# Altium PCB ZYNQ-HS-DEV-PCB.PcbDoc (part 6 of 13)
Units mm, origin at the board's own origin, x right, y up, seen from the top; angles counter-clockwise.
Board outline 125.73 x 111.93 mm, 10 copper layers (S1 (SIG), S2 (GND), S3 (SIG), S4 (GND), S5 (PWR), S6 (SIG), S7 (GND), S8 (SIG), S9 (GND), S10 (SIG)), stack 1.597 mm thick; 545 components, 400 nets, 2449 pads, 1577 vias.
Unrouted connection lines stored in the file: 309.
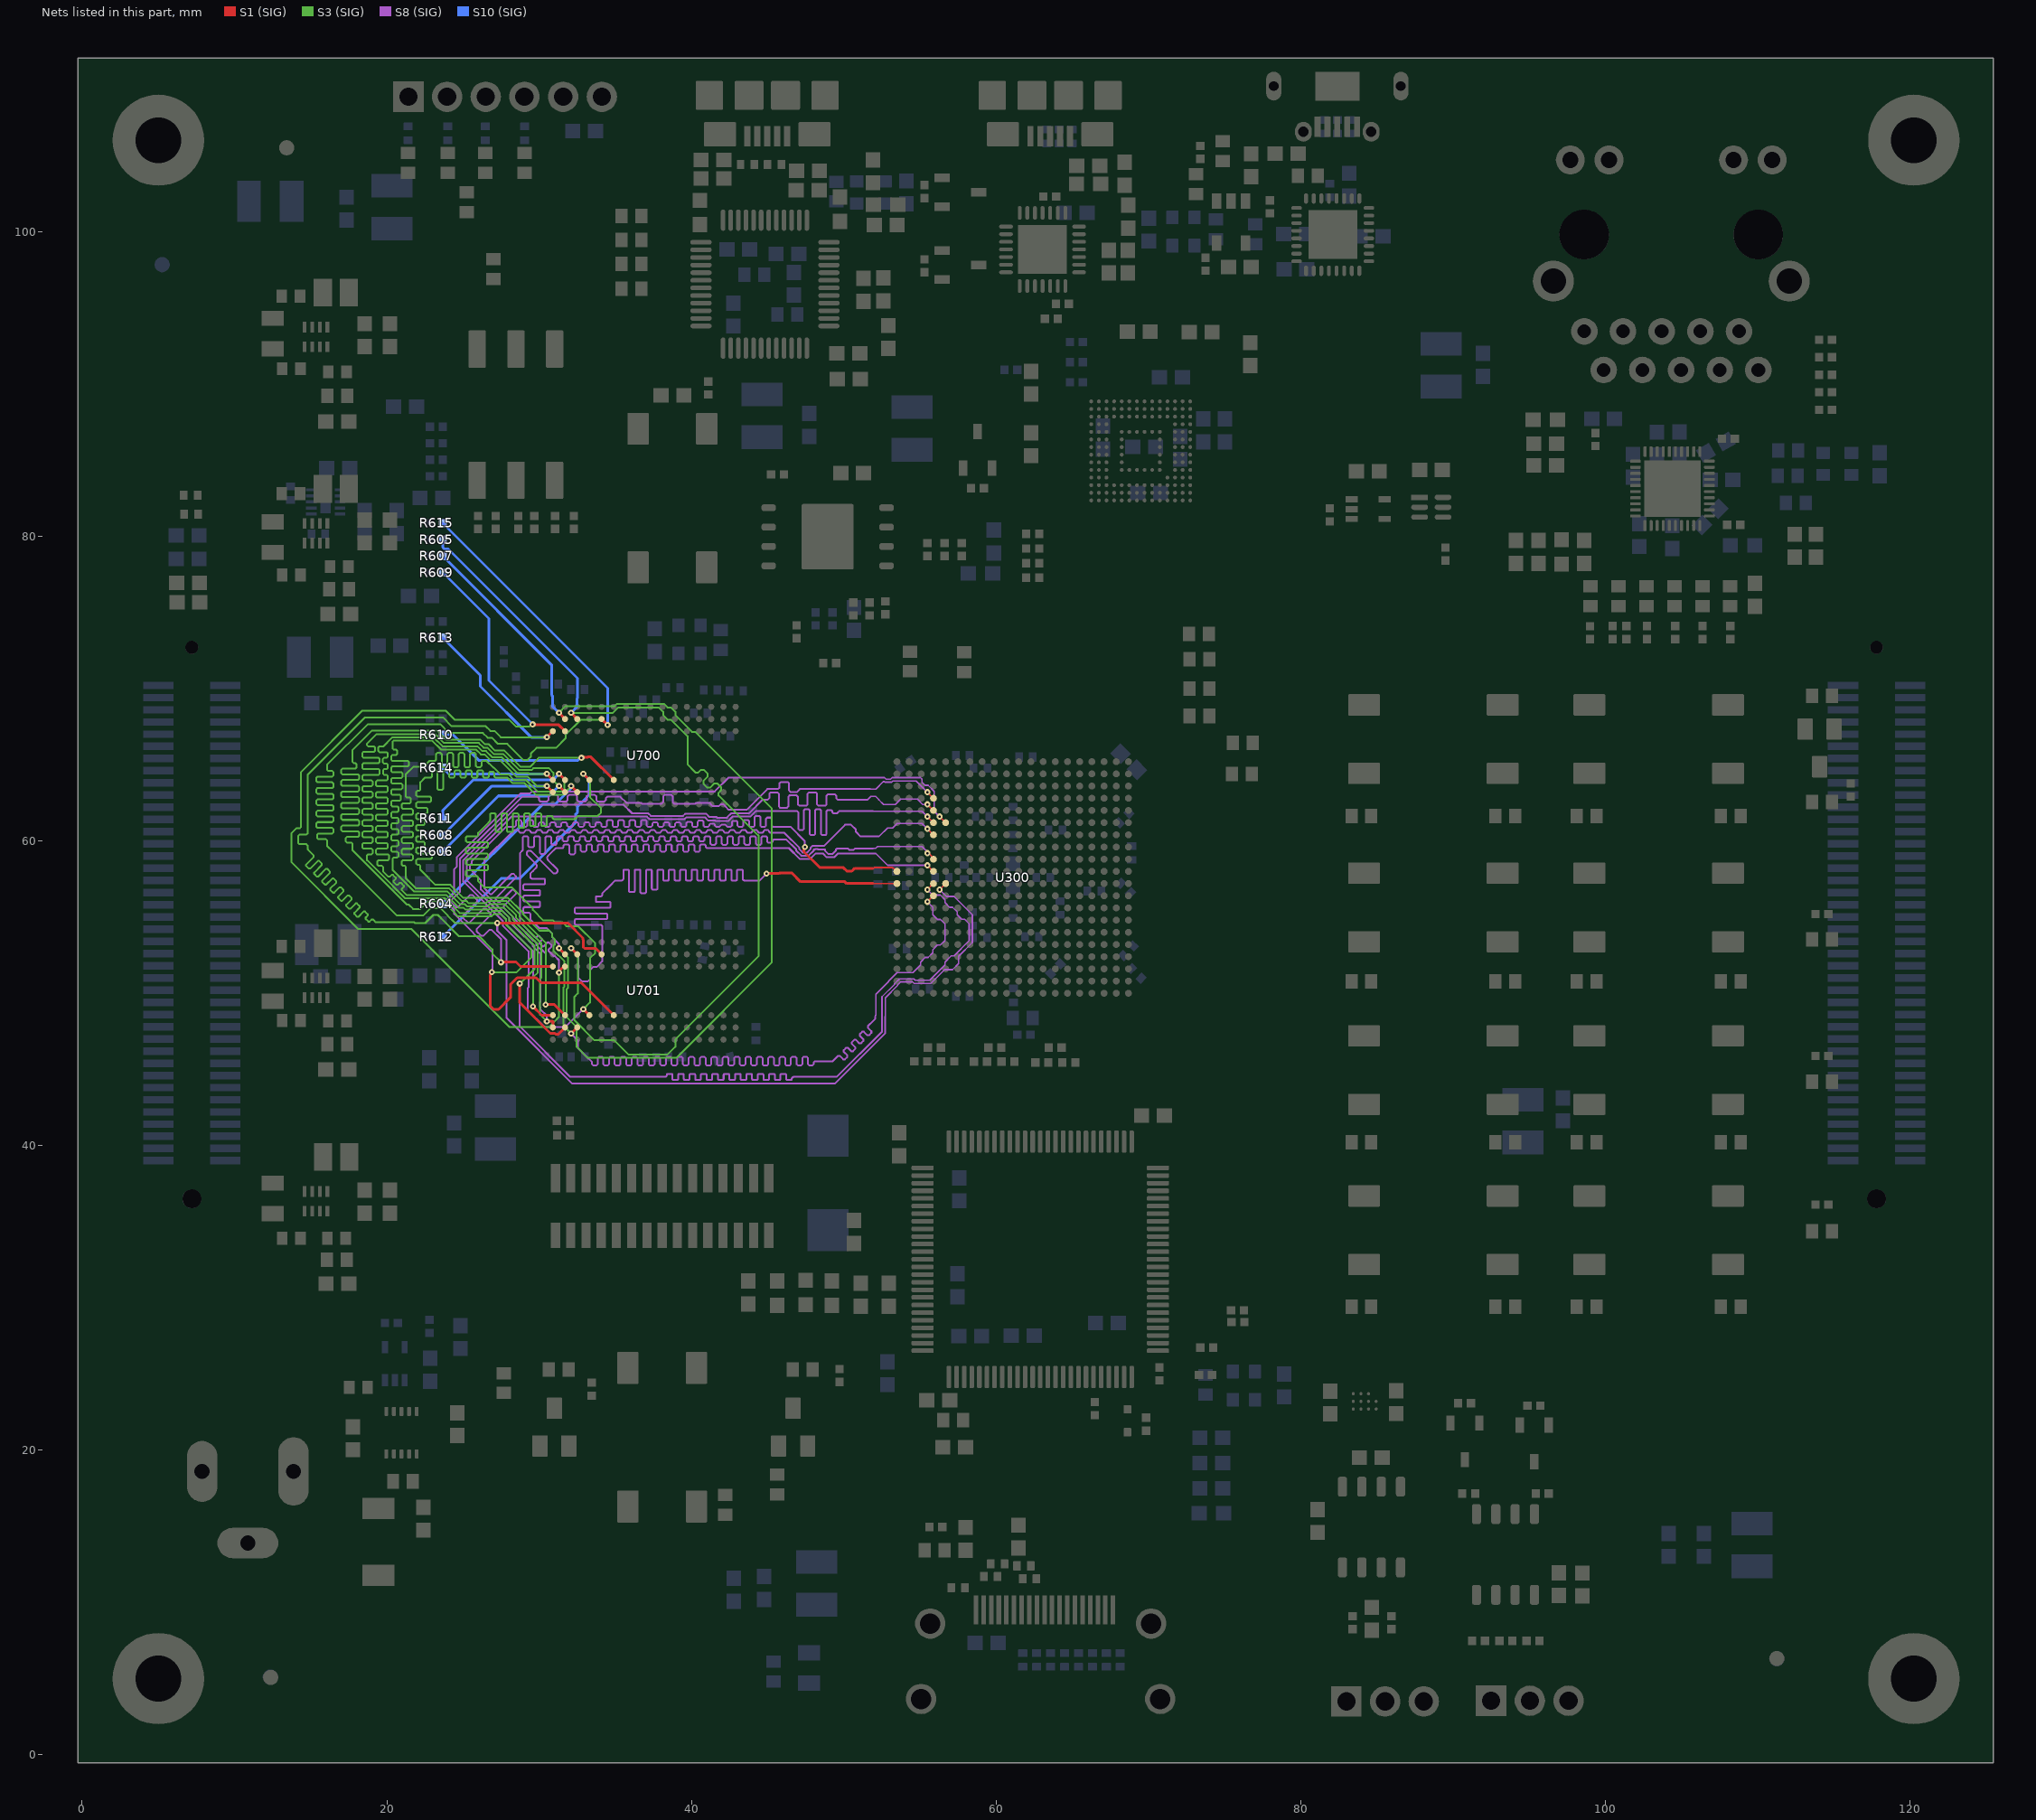
[diagram p13: the nets of this part, all layers, seen from the top]

## Via types
v1: diameter 0.4, hole 0.15, S1 (SIG) to S10 (SIG), tented both sides, 892 vias
v2: diameter 0.5, hole 0.2, S1 (SIG) to S10 (SIG), tented both sides, 231 vias
v3: diameter 0.6, hole 0.3, S1 (SIG) to S10 (SIG), tented both sides, 188 vias
v4: diameter 1, hole 0.5, S1 (SIG) to S10 (SIG), tented both sides, 158 vias
v5: diameter 0.5, hole 0.25, S1 (SIG) to S10 (SIG), tented both sides, 108 vias

## Nets (pads, with @x,y where several pads share a name; then routed paths per layer and width w, separated by ;. In a path a pad name is that pad's centre, name@x,y a point inside that pad or via, vN(x,y) a via of type N, cw(c..) or ccw(c..) an arc to the next point about the centre after c; other vN are vias at no path point) (continued)
DDR_A4: R604.2 U300.M4 U700.P8 U701.P8 | length 116.3
  S1 (SIG) w0.11: v1(55.488,55.995) U300.M4@55.888,56.395
  S1 (SIG) w0.18: v1(32.1,47.35) U701.P8@32.5,47.75 ; v1(32.1,63.6) U700.P8@32.5,63.2
  S3 (SIG) w0.119: v1(32.1,47.35) 31.596,47.854 31.596,50.365 31.66,50.428 31.66,52.082 30.94,52.801 30.94,53.099 31.039,53.197 31.039,53.503 30.86,53.682 30.86,53.899 30.649,54.11 30.01,54.11 28.925,55.195 28.925,55.294 27.944,56.275 24.999,56.275 24.166,57.107 23.193,57.107 22.2,58.1 22.2,58.3 22.2,58.36 22.125,58.434 22.001,58.434 21.927,58.509 21.927,58.733 22.001,58.807 22.881,58.807 22.956,58.882 22.956,59.106 22.881,59.181 22.001,59.181 21.927,59.255 21.927,59.479 22.001,59.554 22.42,59.554 22.494,59.628 22.494,59.852 22.42,59.927 22.001,59.927 21.927,60.002 21.927,60.226 22.001,60.3 22.42,60.3 22.494,60.375 22.494,60.599 22.42,60.673 22.001,60.673 21.927,60.748 21.927,60.972 22.001,61.047 22.42,61.047 22.494,61.121 22.494,61.345 22.42,61.42 22.001,61.42 21.927,61.494 21.927,61.718 22.001,61.793 22.601,61.793 22.676,61.868 22.676,62.091 22.601,62.166 22.001,62.166 21.927,62.241 21.927,62.465 22.001,62.539 22.831,62.539 22.906,62.614 22.906,62.838 22.831,62.913 22.001,62.913 21.927,62.987 21.927,63.211 22.001,63.286 22.125,63.286 22.2,63.36 22.2,63.694 22.2,63.85 22.5,64.15 22.825,64.15 22.885,64.15 22.959,64.225 22.959,64.553 23.034,64.627 23.258,64.627 23.332,64.553 23.332,63.419 23.407,63.344 23.631,63.344 23.706,63.419 23.706,64.553 23.78,64.627 24.004,64.627 24.079,64.553 24.079,64.225 24.153,64.15 24.377,64.15 24.452,64.225 24.452,64.553 24.527,64.627 24.751,64.627 24.825,64.553 24.825,64.225 24.9,64.15 25.124,64.15 25.198,64.225 25.198,64.553 25.273,64.627 25.497,64.627 25.572,64.553 25.572,64.225 25.646,64.15 25.87,64.15 25.945,64.225 25.945,64.553 26.019,64.627 26.243,64.627 26.318,64.553 26.318,64.225 26.393,64.15 26.617,64.15 26.691,64.225 26.691,64.448 26.766,64.522 26.99,64.522 27.064,64.448 27.064,64.225 27.139,64.15 27.803,64.15 27.898,64.15 28.267,63.781 29.043,63.781 29.803,63.021 31.54,63.021 32.1,63.581 v1(32.1,63.6)
  S8 (SIG) w0.1: 52.072,48.45 52.081,48.45 52.081,48.537 52.1,48.556 52.1,48.62 52.11,48.629 52.11,49.927 52.938,50.755 52.938,50.788 53.494,51.345 54.533,51.345 55.038,51.85 55.038,52.04 55.346,52.348 55.536,52.348 55.844,52.656 55.844,52.846 56.149,53.151 56.339,53.151 56.638,53.45 56.638,54.54 56.336,54.842 56.146,54.842 55.844,55.144 55.844,55.639 v1(55.488,55.995)
  S8 (SIG) w0.119: v1(32.1,47.35) 32.54,46.91 32.54,46.401 33.08,45.861 33.468,45.474 33.468,45.332 33.543,45.257 33.766,45.257 33.841,45.332 33.841,45.737 33.916,45.812 34.14,45.812 34.214,45.737 34.214,45.332 34.289,45.257 34.513,45.257 34.587,45.332 34.587,45.737 34.662,45.812 34.886,45.812 34.961,45.737 34.961,45.332 35.035,45.257 35.259,45.257 35.334,45.332 35.334,45.737 35.409,45.812 35.632,45.812 35.707,45.737 35.707,45.332 35.782,45.257 36.006,45.257 36.08,45.332 36.08,45.737 36.155,45.812 36.379,45.812 36.453,45.737 36.453,45.332 36.528,45.257 36.752,45.257 36.827,45.332 36.827,45.737 36.901,45.812 37.125,45.812 37.2,45.737 37.2,45.332 37.274,45.257 37.498,45.257 37.573,45.332 37.573,45.737 37.648,45.812 37.872,45.812 37.946,45.737 37.946,45.332 38.021,45.257 38.245,45.257 38.319,45.332 38.319,45.737 38.394,45.812 38.618,45.812 38.693,45.737 38.693,45.332 38.767,45.257 38.991,45.257 39.066,45.332 39.066,45.737 39.14,45.812 39.364,45.812 39.439,45.737 39.439,45.332 39.514,45.257 39.738,45.257 39.812,45.332 39.812,45.737 39.887,45.812 40.111,45.812 40.185,45.737 40.185,45.332 40.26,45.257 40.484,45.257 40.559,45.332 40.559,45.737 40.633,45.812 40.857,45.812 40.932,45.737 40.932,45.332 41.006,45.257 41.23,45.257 41.305,45.332 41.305,45.737 41.38,45.812 41.603,45.812 41.678,45.737 41.678,45.332 41.753,45.257 41.977,45.257 42.051,45.332 42.051,45.737 42.126,45.812 42.35,45.812 42.424,45.737 42.424,45.332 42.499,45.257 42.723,45.257 42.798,45.332 42.798,45.737 42.872,45.812 43.096,45.812 43.171,45.737 43.171,45.332 43.245,45.257 43.469,45.257 43.544,45.332 43.544,45.737 43.619,45.812 43.843,45.812 43.917,45.737 43.917,45.332 43.992,45.257 44.216,45.257 44.29,45.332 44.29,45.737 44.365,45.812 44.589,45.812 44.664,45.737 44.664,45.332 44.738,45.257 44.962,45.257 45.037,45.332 45.037,45.737 45.111,45.812 45.335,45.812 45.41,45.737 45.41,45.332 45.485,45.257 45.709,45.257 45.783,45.332 45.783,45.737 45.858,45.812 46.082,45.812 46.156,45.737 46.156,45.332 46.231,45.257 46.455,45.257 46.53,45.332 46.53,45.737 46.604,45.812 46.828,45.812 46.903,45.737 46.903,45.332 46.977,45.257 47.201,45.257 47.276,45.332 47.276,45.737 47.351,45.812 47.574,45.812 47.649,45.737 47.649,45.332 47.724,45.257 47.948,45.257 48.022,45.332 48.022,45.45 48.097,45.525 48.157,45.525 48.171,45.525 49.275,45.525 49.632,45.882 49.737,45.882 49.964,45.655 50.07,45.655 50.228,45.813 50.228,45.918 50,46.146 50,46.252 50.159,46.41 50.264,46.41 50.492,46.182 50.597,46.182 50.756,46.341 50.756,46.446 50.528,46.674 50.528,46.779 50.686,46.938 50.792,46.938 51.02,46.71 51.125,46.71 51.284,46.868 51.284,46.974 51.056,47.202 51.056,47.307 51.214,47.465 51.32,47.465 51.547,47.238 51.653,47.238 51.811,47.396 51.811,47.502 51.584,47.729 51.584,47.834 51.947,48.197 52.072,48.322 52.072,48.45
  S10 (SIG) w0.18: R604.2@23.675,55.856 30.209,62.39 31.038,62.39 32.058,63.41 32.058,63.558 v1(32.1,63.6)
DDR_A5: R605.2 U300.L1 U700.P2 U701.P2 | length 121.5
  S1 (SIG) w0.11: 51.9,57.197 53.485,57.197 U300.L1@53.488,57.195
  S1 (SIG) w0.18: v1(32.1,52.95) U701.P2@32.5,52.55 ; v1(32.1,68.4) U700.P2@32.5,68 ; v1(44.925,57.85) 45.752,57.85 45.802,57.9 46.57,57.9 47.155,57.314 50.068,57.314 50.185,57.197 51.9,57.197
  S3 (SIG) w0.119: v1(32.1,52.95) 32.535,52.515 32.535,49.976 32.321,49.763 32.321,48.22 33.632,46.91 34.922,46.91 35.86,45.971 38.43,45.971 38.94,46.482 38.94,46.972 44.419,52.451 44.419,60.336 44.377,60.378 41.776,62.979 41.776,63.156 41.949,63.329 41.949,63.506 41.682,63.772 41.505,63.772 41.223,63.49 41.045,63.49 40.779,63.756 40.779,63.933 41.062,64.216 41.062,64.393 40.795,64.659 40.618,64.659 40.446,64.487 40.268,64.487 40.226,64.529 39.74,65.014 39.74,66.868 38.649,67.96 38.432,67.96 38.14,68.251 38.14,68.468 37.849,68.76 35.192,68.76 34.833,68.4 v1(32.1,68.4)
  S8 (SIG) w0.119: v1(32.1,52.95) 32.575,52.475 32.575,51 32.8,50.775 33.2,50.775 33.34,50.915 33.34,51.499 33.551,51.71 33.768,51.71 34.14,52.082 34.14,54.311 34.14,54.371 ccw(c34.021,54.371) 34.021,54.49 32.422,54.49 cw(c32.422,54.565) 32.348,54.565 32.348,54.788 cw(c32.422,54.788) 32.422,54.863 34.395,54.863 ccw(c34.395,54.938) 34.47,54.938 34.47,55.162 ccw(c34.395,55.162) 34.395,55.236 32.422,55.236 cw(c32.422,55.311) 32.348,55.311 32.348,55.535 cw(c32.422,55.535) 32.422,55.609 34.618,55.609 ccw(c34.618,55.684) 34.693,55.684 34.693,55.908 ccw(c34.618,55.908) 34.618,55.983 33.795,55.983 cw(c33.795,56.057) 33.721,56.057 33.721,56.281 cw(c33.795,56.281) 33.795,56.356 34.021,56.356 ccw(c34.021,56.475) 34.14,56.475 34.14,56.54 34.632,57.032 35,57.4 35.35,57.4 35.41,57.4 ccw(c35.41,57.519) 35.529,57.519 35.529,58.033 cw(c35.603,58.033) 35.603,58.108 35.827,58.108 cw(c35.827,58.033) 35.902,58.033 35.902,56.72 ccw(c35.977,56.72) 35.977,56.646 36.201,56.646 ccw(c36.201,56.72) 36.275,56.72 36.275,58.033 cw(c36.35,58.033) 36.35,58.108 36.574,58.108 cw(c36.574,58.033) 36.648,58.033 36.648,56.645 ccw(c36.723,56.645) 36.723,56.571 36.947,56.571 ccw(c36.947,56.645) 37.022,56.645 37.022,58.033 cw(c37.096,58.033) 37.096,58.108 37.32,58.108 cw(c37.32,58.033) 37.395,58.033 37.395,56.878 ccw(c37.469,56.878) 37.469,56.803 37.693,56.803 ccw(c37.693,56.878) 37.768,56.878 37.768,58.033 cw(c37.843,58.033) 37.843,58.108 38.067,58.108 cw(c38.067,58.033) 38.141,58.033 38.141,57.473 ccw(c38.216,57.473) 38.216,57.398 38.44,57.398 ccw(c38.44,57.473) 38.514,57.473 38.514,58.033 cw(c38.589,58.033) 38.589,58.108 38.813,58.108 cw(c38.813,58.033) 38.888,58.033 38.888,57.473 ccw(c38.962,57.473) 38.962,57.398 39.186,57.398 ccw(c39.186,57.473) 39.261,57.473 39.261,58.033 cw(c39.335,58.033) 39.335,58.108 39.559,58.108 cw(c39.559,58.033) 39.634,58.033 39.634,57.473 ccw(c39.709,57.473) 39.709,57.398 39.932,57.398 ccw(c39.932,57.473) 40.007,57.473 40.007,58.033 cw(c40.082,58.033) 40.082,58.108 40.306,58.108 cw(c40.306,58.033) 40.38,58.033 40.38,57.473 ccw(c40.455,57.473) 40.455,57.398 40.679,57.398 ccw(c40.679,57.473) 40.753,57.473 40.753,58.033 cw(c40.828,58.033) 40.828,58.108 41.052,58.108 cw(c41.052,58.033) 41.127,58.033 41.127,57.473 ccw(c41.201,57.473) 41.201,57.398 41.425,57.398 ccw(c41.425,57.473) 41.5,57.473 41.5,58.033 cw(c41.574,58.033) 41.574,58.108 41.798,58.108 cw(c41.798,58.033) 41.873,58.033 41.873,57.473 ccw(c41.948,57.473) 41.948,57.398 42.172,57.398 ccw(c42.172,57.473) 42.246,57.473 42.246,58.033 cw(c42.321,58.033) 42.321,58.108 42.545,58.108 cw(c42.545,58.033) 42.619,58.033 42.619,57.473 ccw(c42.694,57.473) 42.694,57.398 42.918,57.398 ccw(c42.918,57.473) 42.993,57.473 42.993,58.033 cw(c43.067,58.033) 43.067,58.108 43.291,58.108 cw(c43.291,58.033) 43.366,58.033 43.366,57.519 ccw(c43.485,57.519) 43.485,57.4 44.022,57.4 44.475,57.4 v1(44.925,57.85)
  S10 (SIG) w0.18: R605.2@23.675,79.776 23.675,79.267 23.78,79.161 24.029,79.161 32.515,70.675 32.515,69.367 32.49,69.342 32.49,68.79 v1(32.1,68.4)
DDR_A6: R606.2 U300.L4 U700.R8 U701.R8 | length 119.1
  S1 (SIG) w0.11: v1(55.488,56.795) U300.L4@55.888,57.195
  S1 (SIG) w0.18: v1(28.725,50.625) 28.725,49.373 30.738,47.36 31.042,47.36 31.095,47.307 31.257,47.307 U701.R8@31.7,47.75 ; v1(31.3,63.6) U700.R8@31.7,63.2
  S3 (SIG) w0.119: v1(28.725,50.625) 29.698,51.598 29.698,53.114 28.048,54.764 28.048,54.931 27.581,55.398 26.919,55.398 26.779,55.258 24.776,55.258 23.803,56.231 21.204,56.231 19.497,57.937 18.7,58.735 18.7,59.042 18.775,59.116 18.993,59.116 19.068,59.191 19.068,59.415 18.993,59.49 18.464,59.49 18.39,59.564 18.39,59.788 18.464,59.863 18.993,59.863 19.068,59.937 19.068,60.161 18.993,60.236 18.471,60.236 18.396,60.311 18.396,60.534 18.471,60.609 18.993,60.609 19.068,60.684 19.068,60.908 18.993,60.982 18.471,60.982 18.396,61.057 18.396,61.281 18.471,61.355 18.993,61.355 19.068,61.43 19.068,61.654 18.993,61.729 18.471,61.729 18.396,61.803 18.396,62.027 18.471,62.102 18.993,62.102 19.068,62.176 19.068,62.4 18.993,62.475 18.471,62.475 18.396,62.55 18.396,62.774 18.471,62.848 18.993,62.848 19.068,62.923 19.068,63.147 18.993,63.221 18.471,63.221 18.396,63.296 18.396,63.52 18.471,63.595 18.993,63.595 19.068,63.669 19.068,63.893 18.993,63.968 18.471,63.968 18.396,64.042 18.396,64.266 18.471,64.341 19.455,64.341 19.529,64.416 19.529,64.64 19.455,64.714 18.464,64.714 18.39,64.789 18.39,65.013 18.464,65.087 19.439,65.087 19.514,65.162 19.514,65.386 19.439,65.461 18.464,65.461 18.39,65.535 18.39,65.759 18.464,65.834 19.145,65.834 19.22,65.908 19.22,66.132 19.145,66.207 18.775,66.207 18.7,66.282 18.7,66.349 18.7,66.39 19.318,67.008 23.172,67.008 23.753,66.426 26.04,66.426 26.351,66.116 26.609,66.116 27.021,65.704 27.632,65.704 28.679,64.658 29.521,64.658 29.623,64.76 30.649,64.76 30.94,64.468 30.94,63.96 v1(31.3,63.6)
  S8 (SIG) w0.1: 52.51,48.45 52.51,49.761 53.338,50.589 53.338,50.623 53.66,50.945 54.596,50.945 54.696,50.845 55.633,50.845 56.638,51.85 56.638,52.04 57.043,52.445 57.233,52.445 58.238,53.45 58.238,54.54 57.934,54.843 57.744,54.843 57.44,55.147 57.44,55.337 57.137,55.641 56.947,55.641 56.643,55.944 56.643,56.134 56.34,56.438 55.845,56.438 v1(55.488,56.795)
  S8 (SIG) w0.119: v1(28.725,50.625) 28.725,47.816 32.041,44.5 32.35,44.5 38.26,44.5 ccw(c38.26,44.619) 38.379,44.619 38.379,44.631 cw(c38.454,44.631) 38.454,44.706 38.678,44.706 cw(c38.678,44.631) 38.752,44.631 38.752,44.375 ccw(c38.827,44.375) 38.827,44.3 39.051,44.3 ccw(c39.051,44.375) 39.126,44.375 39.126,44.631 cw(c39.2,44.631) 39.2,44.706 39.424,44.706 cw(c39.424,44.631) 39.499,44.631 39.499,44.375 ccw(c39.573,44.375) 39.573,44.3 39.797,44.3 ccw(c39.797,44.375) 39.872,44.375 39.872,44.631 cw(c39.947,44.631) 39.947,44.706 40.17,44.706 cw(c40.17,44.631) 40.245,44.631 40.245,44.375 ccw(c40.32,44.375) 40.32,44.3 40.544,44.3 ccw(c40.544,44.375) 40.618,44.375 40.618,44.631 cw(c40.693,44.631) 40.693,44.706 40.917,44.706 cw(c40.917,44.631) 40.991,44.631 40.991,44.375 ccw(c41.066,44.375) 41.066,44.3 41.29,44.3 ccw(c41.29,44.375) 41.365,44.375 41.365,44.631 cw(c41.439,44.631) 41.439,44.706 41.663,44.706 cw(c41.663,44.631) 41.738,44.631 41.738,44.375 ccw(c41.812,44.375) 41.812,44.3 42.036,44.3 ccw(c42.036,44.375) 42.111,44.375 42.111,44.631 cw(c42.186,44.631) 42.186,44.706 42.41,44.706 cw(c42.41,44.631) 42.484,44.631 42.484,44.375 ccw(c42.559,44.375) 42.559,44.3 42.783,44.3 ccw(c42.783,44.375) 42.857,44.375 42.857,44.631 cw(c42.932,44.631) 42.932,44.706 43.156,44.706 cw(c43.156,44.631) 43.231,44.631 43.231,44.375 ccw(c43.305,44.375) 43.305,44.3 43.529,44.3 ccw(c43.529,44.375) 43.604,44.375 43.604,44.631 cw(c43.678,44.631) 43.678,44.706 43.902,44.706 cw(c43.902,44.631) 43.977,44.631 43.977,44.375 ccw(c44.052,44.375) 44.052,44.3 44.276,44.3 ccw(c44.276,44.375) 44.35,44.375 44.35,44.631 cw(c44.425,44.631) 44.425,44.706 44.649,44.706 cw(c44.649,44.631) 44.723,44.631 44.723,44.375 ccw(c44.798,44.375) 44.798,44.3 45.022,44.3 ccw(c45.022,44.375) 45.097,44.375 45.097,44.631 cw(c45.171,44.631) 45.171,44.706 45.395,44.706 cw(c45.395,44.631) 45.47,44.631 45.47,44.375 ccw(c45.544,44.375) 45.544,44.3 45.768,44.3 ccw(c45.768,44.375) 45.843,44.375 45.843,44.631 cw(c45.918,44.631) 45.918,44.706 46.141,44.706 cw(c46.141,44.631) 46.216,44.631 46.216,44.375 ccw(c46.291,44.375) 46.291,44.3 46.515,44.3 ccw(c46.515,44.375) 46.589,44.375 46.589,44.381 cw(c46.709,44.381) 46.709,44.5 46.768,44.5 49.535,44.5 52.51,47.475 52.51,48.45
  S10 (SIG) w0.18: R606.2@23.675,59.297 27.328,62.95 30.65,62.95 v1(31.3,63.6)
DDR_A7: R607.2 U300.K4 U700.R2 U701.R2 | length 119.6
  S1 (SIG) w0.11: v1(55.488,58.395) U300.K4@55.888,57.995
  S1 (SIG) w0.18: v1(31.3,52.95) U701.R2@31.7,52.55 ; v1(31.3,68.4) U700.R2@31.7,68
  S3 (SIG) w0.119: v1(31.3,52.95) 31.3,52.931 31.879,52.353 31.879,50.337 31.815,50.274 31.815,48.416 32.46,47.772 32.46,46.482 33.189,45.752 39.011,45.752 45.285,52.026 45.285,62.124 40.249,67.16 40.032,67.16 38.94,68.251 38.94,68.468 38.649,68.76 38.432,68.76 38.213,68.979 35.084,68.979 34.945,68.84 31.74,68.84 v1(31.3,68.4)
  S8 (SIG) w0.1: 51.9,59.169 52.111,59.169 52.886,58.395 v1(55.488,58.395)
  S8 (SIG) w0.119: v1(31.3,52.95) 31.3,53.225 30.86,53.665 30.86,53.899 30.484,54.275 29.994,54.275 29.425,54.844 29.425,55.1 29.425,55.16 ccw(c29.306,55.16) 29.306,55.279 29.044,55.279 cw(c29.044,55.353) 28.969,55.353 28.969,55.577 cw(c29.044,55.577) 29.044,55.652 29.983,55.652 ccw(c29.983,55.727) 30.058,55.727 30.058,55.951 ccw(c29.983,55.951) 29.983,56.025 29.044,56.025 cw(c29.044,56.1) 28.969,56.1 28.969,56.324 cw(c29.044,56.324) 29.044,56.398 29.981,56.398 ccw(c29.981,56.473) 30.056,56.473 30.056,56.697 ccw(c29.981,56.697) 29.981,56.772 29.044,56.772 cw(c29.044,56.846) 28.969,56.846 28.969,57.07 cw(c29.044,57.07) 29.044,57.145 30.31,57.145 ccw(c30.31,57.219) 30.385,57.219 30.385,57.443 ccw(c30.31,57.443) 30.31,57.518 29.544,57.518 cw(c29.544,57.637) 29.425,57.637 29.425,57.85 29.6,58.025 29.75,58.175 29.792,58.217 ccw(c29.66,58.349) 29.792,58.481 29.236,59.037 cw(c29.368,59.169) 29.236,59.301 cw(c29.368,59.169) 29.5,59.301 30.889,57.912 ccw(c31.021,58.044) 31.152,57.912 ccw(c31.021,58.044) 31.152,58.176 30.584,58.745 cw(c30.716,58.877) 30.584,59.009 30.988,59.412 31.1,59.525 31.475,59.525 31.535,59.525 31.609,59.6 31.609,59.689 31.684,59.763 31.908,59.763 31.982,59.689 31.982,59.19 32.057,59.116 32.281,59.116 32.356,59.19 32.356,59.689 32.43,59.763 32.654,59.763 32.729,59.689 32.729,59.369 32.803,59.294 33.027,59.294 33.102,59.369 33.102,59.689 33.177,59.763 33.401,59.763 33.475,59.689 33.475,59.369 33.55,59.294 33.774,59.294 33.848,59.369 33.848,59.689 33.923,59.763 34.147,59.763 34.222,59.689 34.222,59.369 34.296,59.294 34.52,59.294 34.595,59.369 34.595,59.689 34.669,59.763 34.893,59.763 34.968,59.689 34.968,59.369 35.043,59.294 35.267,59.294 35.341,59.369 35.341,59.689 35.416,59.763 35.64,59.763 35.714,59.689 35.714,59.369 35.789,59.294 36.013,59.294 36.088,59.369 36.088,59.689 36.162,59.763 36.386,59.763 36.461,59.689 36.461,59.369 36.535,59.294 36.759,59.294 36.834,59.369 36.834,59.689 36.909,59.763 37.132,59.763 37.207,59.689 37.207,59.369 37.282,59.294 37.506,59.294 37.58,59.369 37.58,59.689 37.655,59.763 37.879,59.763 37.953,59.689 37.953,59.369 38.028,59.294 38.252,59.294 38.327,59.369 38.327,59.689 38.401,59.763 38.625,59.763 38.7,59.689 38.7,59.369 38.775,59.294 38.998,59.294 39.073,59.369 39.073,59.689 39.148,59.763 39.372,59.763 39.446,59.689 39.446,59.369 39.521,59.294 39.745,59.294 39.819,59.369 39.819,59.689 39.894,59.763 40.118,59.763 40.193,59.689 40.193,59.369 40.267,59.294 40.491,59.294 40.566,59.369 40.566,59.689 40.64,59.763 40.864,59.763 40.939,59.689 40.939,59.6 41.014,59.525 41.325,59.525 46.397,59.525 47.119,58.802 47.781,58.802 48.134,59.156 48.651,59.156 48.885,58.921 49.365,58.921 49.613,59.169 51.9,59.169
  S10 (SIG) w0.18: R607.2@23.675,78.696 30.815,71.556 30.815,69.566 30.89,69.491 30.89,68.81 v1(31.3,68.4)
DDR_A8: R608.2 U300.K1 U700.T8 U701.T8 | length 113.2
  S1 (SIG) w0.11: 51.9,58.2 51.9,58.235 52.002,58.235 52.011,58.244 53.204,58.244 53.243,58.205 53.278,58.205 U300.K1@53.488,57.995
  S1 (SIG) w0.18: v1(30.5,48.15) 30.87,48.15 30.9,48.12 U701.T8@30.9,47.75 ; v1(30.5,63.6) U700.T8@30.9,63.2 ; v1(47.45,59.6) 47.38,59.6 47.38,59.29 48.425,58.244 49.978,58.244 49.978,58.238 50.207,58.01 50.53,58.01 50.72,58.2 51.9,58.2
  S3 (SIG) w0.119: v1(30.5,48.15) 30.065,48.585 30.065,50.942 30.136,51.013 30.136,53.295 28.486,54.945 28.486,55.112 27.762,55.836 26.738,55.836 26.598,55.696 25.267,55.696 25.127,55.836 24.817,55.836 23.984,56.669 21.806,56.669 20.375,58.1 20.375,58.4 20.375,58.833 20.45,58.907 20.693,58.907 20.768,58.982 20.768,59.206 20.693,59.281 20.358,59.281 20.283,59.355 20.283,59.579 20.358,59.654 20.693,59.654 20.768,59.728 20.768,59.952 20.693,60.027 20.358,60.027 20.283,60.102 20.283,60.326 20.358,60.4 20.693,60.4 20.768,60.475 20.768,60.699 20.693,60.773 20.358,60.773 20.283,60.848 20.283,61.072 20.358,61.147 20.693,61.147 20.768,61.221 20.768,61.445 20.693,61.52 20.358,61.52 20.283,61.594 20.283,61.818 20.358,61.893 20.693,61.893 20.768,61.968 20.768,62.191 20.693,62.266 20.358,62.266 20.283,62.341 20.283,62.565 20.358,62.639 20.855,62.639 20.93,62.714 20.93,62.938 20.855,63.013 20.358,63.013 20.283,63.087 20.283,63.311 20.358,63.386 20.956,63.386 21.031,63.46 21.031,63.684 20.956,63.759 20.358,63.759 20.283,63.834 20.283,64.057 20.358,64.132 20.956,64.132 21.031,64.207 21.031,64.431 20.956,64.505 20.358,64.505 20.283,64.58 20.283,64.804 20.358,64.878 21.369,64.878 21.444,64.953 21.444,65.177 21.369,65.252 20.358,65.252 20.283,65.326 20.283,65.55 20.358,65.625 20.605,65.625 20.68,65.699 20.68,65.923 20.605,65.998 20.45,65.998 20.375,66.073 20.375,66.5 20.445,66.569 22.99,66.569 23.572,65.988 25.859,65.988 26.169,65.677 26.428,65.677 26.839,65.266 27.451,65.266 28.497,64.219 29.225,64.219 29.844,63.6 v1(30.5,63.6)
  S8 (SIG) w0.119: v1(30.5,48.15) 30.5,48.52 30.08,48.94 30.08,49.087 30.065,49.101 30.065,49.399 30.08,49.413 30.08,52.63 30.041,52.63 30.02,52.652 29.604,53.067 29.583,53.089 29.583,53.222 29.541,53.222 29.048,53.715 29.013,53.715 28.168,54.56 28.168,54.592 28.048,54.712 28.048,54.931 26.181,56.798 26.181,57.414 25.459,58.136 25.459,58.423 25.579,58.543 25.579,58.672 27.832,60.925 28.341,60.925 28.401,60.925 28.475,61 28.475,61.293 28.55,61.367 28.774,61.367 28.849,61.293 28.849,61 28.923,60.925 29.147,60.925 29.222,61 29.222,61.293 29.296,61.367 29.52,61.367 29.595,61.293 29.595,61 29.67,60.925 29.893,60.925 29.968,61 29.968,61.127 30.043,61.202 30.267,61.202 30.341,61.127 30.341,61 30.416,60.925 30.64,60.925 30.714,61 30.714,61.127 30.789,61.202 31.013,61.202 31.088,61.127 31.088,61 31.162,60.925 31.386,60.925 31.461,61 31.461,61.127 31.535,61.202 31.759,61.202 31.834,61.127 31.834,61 31.909,60.925 32.133,60.925 32.207,61 32.207,61.127 32.282,61.202 32.506,61.202 32.58,61.127 32.58,61 32.655,60.925 32.879,60.925 32.954,61 32.954,61.127 33.028,61.202 33.252,61.202 33.327,61.127 33.327,61 33.401,60.925 33.625,60.925 33.7,61 33.7,61.127 33.775,61.202 33.999,61.202 34.073,61.127 34.073,61 34.148,60.925 34.372,60.925 34.446,61 34.446,61.293 34.521,61.367 34.745,61.367 34.82,61.293 34.82,61 34.894,60.925 35.118,60.925 35.193,61 35.193,61.293 35.267,61.367 35.491,61.367 35.566,61.293 35.566,61 35.641,60.925 35.864,60.925 35.939,61 35.939,61.293 36.014,61.367 36.238,61.367 36.312,61.293 36.312,61 36.387,60.925 36.611,60.925 36.685,61 36.685,61.293 36.76,61.367 36.984,61.367 37.059,61.293 37.059,61 37.133,60.925 37.357,60.925 37.432,61 37.432,61.127 37.507,61.202 37.73,61.202 37.805,61.127 37.805,61 37.88,60.925 38.104,60.925 38.178,61 38.178,61.127 38.253,61.202 38.477,61.202 38.551,61.127 38.551,61 38.626,60.925 38.85,60.925 38.925,61 38.925,61.127 38.999,61.202 39.223,61.202 39.298,61.127 39.298,61 39.372,60.925 39.596,60.925 39.671,61 39.671,61.171 39.746,61.246 39.97,61.246 40.044,61.171 40.044,61 40.119,60.925 40.343,60.925 40.417,61 40.417,61.256 40.492,61.331 40.716,61.331 40.791,61.256 40.791,61 40.865,60.925 41.089,60.925 41.164,61 41.164,61.052 41.238,61.127 41.462,61.127 41.537,61.052 41.537,61 41.612,60.925 41.836,60.925 41.91,61 41.91,61.002 41.985,61.077 42.209,61.077 42.283,61.002 42.283,61 42.358,60.925 42.582,60.925 42.657,61 42.657,61.228 42.731,61.303 42.955,61.303 43.03,61.228 43.03,61 43.104,60.925 43.328,60.925 43.403,61 43.403,61.293 43.478,61.367 43.701,61.367 43.776,61.293 43.776,61 43.851,60.925 44.075,60.925 44.149,61 44.149,61.561 44.224,61.636 44.448,61.636 44.522,61.561 44.522,61 44.597,60.925 44.821,60.925 44.896,61 44.896,61.451 44.97,61.526 45.194,61.526 45.269,61.451 45.269,61 45.343,60.925 46.495,60.925 47.45,59.97 v1(47.45,59.6)
  S10 (SIG) w0.18: R608.2@23.675,60.376 26.899,63.6 v1(30.5,63.6)
DDR_A9: R609.2 U300.J4 U700.R3 U701.R3 | length 119.9
  S1 (SIG) w0.11: v1(55.488,59.195) 55.572,59.195 55.888,58.88 U300.J4@55.888,58.795
  S1 (SIG) w0.18: v1(29.575,67.65) 29.615,67.61 31.29,67.61 U700.R3@31.7,67.2 ; v1(31.3,51.35) 31.3,51.435 31.615,51.75 U701.R3@31.7,51.75
  S3 (SIG) w0.119: v1(29.575,67.65) 29.505,67.65 29.365,67.51 28.471,67.51 28.02,67.961 24.446,67.961 23.864,68.542 18.392,68.542 14.367,64.517 14.367,60.912 14.298,60.842 14.082,60.842 13.731,60.491 13.731,58.609 18.126,54.214 21.611,54.214 28.035,47.79 30.649,47.79 30.86,48.001 30.86,48.055 30.929,48.125 30.984,48.125 31.3,48.441 v1(31.3,51.35)
  S8 (SIG) w0.1: 51.9,59.5 52.092,59.5 52.221,59.63 55.138,59.63 55.488,59.28 v1(55.488,59.195)
  S8 (SIG) w0.119: v1(31.3,51.35) 31.3,52.167 31.039,52.429 30.954,52.429 30.912,52.471 30.648,52.735 cw(c30.732,52.819) 30.648,52.903 30.799,53.054 ccw(c30.746,53.107) 30.799,53.16 30.64,53.318 ccw(c30.588,53.265) 30.535,53.318 30.307,53.09 cw(c30.254,53.143) 30.201,53.09 30.043,53.248 cw(c30.096,53.301) 30.043,53.354 30.162,53.474 ccw(c30.11,53.526) 30.162,53.579 30.004,53.737 ccw(c29.951,53.685) 29.899,53.737 29.856,53.695 cw(c29.772,53.779) 29.688,53.695 28.75,54.633 28.75,54.741 28.75,59.21 28.861,59.321 28.921,59.381 28.921,60.231 28.996,60.306 29.219,60.306 29.294,60.231 29.294,59.65 29.369,59.575 29.593,59.575 29.667,59.65 29.667,60.231 29.742,60.306 29.966,60.306 30.04,60.231 30.04,59.223 30.115,59.149 30.339,59.149 30.414,59.223 30.414,60.231 30.488,60.306 30.712,60.306 30.787,60.231 30.787,59.819 30.861,59.744 31.085,59.744 31.16,59.819 31.16,60.231 31.235,60.306 31.459,60.306 31.533,60.231 31.533,60.057 31.608,59.983 31.832,59.983 31.906,60.057 31.906,60.231 31.981,60.306 32.205,60.306 32.28,60.231 32.28,60.057 32.354,59.983 32.578,59.983 32.653,60.057 32.653,60.231 32.727,60.306 32.951,60.306 33.026,60.231 33.026,60.057 33.101,59.983 33.325,59.983 33.399,60.057 33.399,60.231 33.474,60.306 33.698,60.306 33.772,60.231 33.772,60.057 33.847,59.983 34.071,59.983 34.146,60.057 34.146,60.231 34.22,60.306 34.444,60.306 34.519,60.231 34.519,60.057 34.593,59.983 34.817,59.983 34.892,60.057 34.892,60.231 34.967,60.306 35.19,60.306 35.265,60.231 35.265,60.057 35.34,59.983 35.564,59.983 35.638,60.057 35.638,60.231 35.713,60.306 35.937,60.306 36.012,60.231 36.012,60.057 36.086,59.983 36.31,59.983 36.385,60.057 36.385,60.231 36.459,60.306 36.683,60.306 36.758,60.231 36.758,60.057 36.833,59.983 37.056,59.983 37.131,60.057 37.131,60.231 37.206,60.306 37.43,60.306 37.504,60.231 37.504,60.057 37.579,59.983 37.803,59.983 37.877,60.057 37.877,60.231 37.952,60.306 38.176,60.306 38.251,60.231 38.251,60.057 38.325,59.983 38.549,59.983 38.624,60.057 38.624,60.231 38.698,60.306 38.922,60.306 38.997,60.231 38.997,60.057 39.072,59.983 39.296,59.983 39.37,60.057 39.37,60.231 39.445,60.306 39.669,60.306 39.743,60.231 39.743,60.057 39.818,59.983 40.042,59.983 40.117,60.057 40.117,60.231 40.191,60.306 40.415,60.306 40.49,60.231 40.49,60.057 40.564,59.983 40.788,59.983 40.863,60.057 40.863,60.231 40.938,60.306 41.162,60.306 41.236,60.231 41.236,59.819 41.311,59.744 41.535,59.744 41.609,59.819 41.609,60.231 41.684,60.306 41.908,60.306 41.983,60.231 41.983,59.819 42.057,59.744 42.281,59.744 42.356,59.819 42.356,60.231 42.43,60.306 42.654,60.306 42.729,60.231 42.729,59.819 42.804,59.744 43.027,59.744 43.102,59.819 43.102,60.231 43.177,60.306 43.401,60.306 43.475,60.231 43.475,59.819 43.55,59.744 43.774,59.744 43.848,59.819 43.848,60.231 43.923,60.306 44.147,60.306 44.222,60.231 44.222,59.819 44.296,59.744 44.52,59.744 44.595,59.819 44.595,60.231 44.669,60.306 44.893,60.306 44.968,60.231 44.968,59.946 45.043,59.872 45.267,59.872 45.341,59.946 45.341,60.025 45.416,60.1 45.7,60.1 46.216,60.1 46.871,59.445 46.871,59.36 47.21,59.021 47.69,59.021 48.029,59.36 48.029,59.445 48.03,59.446 48.115,59.446 48.128,59.46 48.284,59.46 48.298,59.446 48.755,59.446 48.765,59.436 48.765,59.351 48.976,59.14 49.274,59.14 49.485,59.351 49.485,59.436 49.549,59.5 50.266,59.5 50.351,59.415 50.649,59.415 50.734,59.5 51.9,59.5
  S10 (SIG) w0.18: R609.2@23.675,77.617 26.696,74.595 26.696,70.529 v1(29.575,67.65)
DDR_A10: R610.2 U300.F5 U700.L7 U701.L7 | length 127.1
  S1 (SIG) w0.11: v1(56.288,61.595) U300.F5@56.688,61.195
  S1 (SIG) w0.18: v1(26.9,51.375) 26.9,51.315 26.785,51.2 26.785,49.163 27.013,48.935 27.337,48.935 28.112,49.711 28.112,50.564 28.563,51.015 29.795,51.015 30.13,50.68 32.77,50.68 U701.L7@34.9,48.55 ; v1(32.775,65.45) 32.817,65.492 33.196,65.492 33.212,65.508 33.392,65.508 U700.L7@34.9,64
  S3 (SIG) w0.119: v1(26.9,51.375) 28.519,51.375 29.479,52.335 29.479,52.853 27.829,54.503 27.829,54.84 27.49,55.179 27.01,55.179 26.87,55.038 24.662,55.038 24.549,55.151 24.549,55.175 23.712,56.011 22.688,56.011 22.206,55.53 21.727,55.53 21.44,55.816 21.308,55.816 17.75,59.375 17.75,59.75 17.75,59.81 17.675,59.884 17.384,59.884 17.309,59.959 17.309,60.183 17.384,60.257 18.102,60.257 18.177,60.332 18.177,60.556 18.102,60.631 17.082,60.631 17.007,60.705 17.007,60.929 17.082,61.004 18.102,61.004 18.177,61.078 18.177,61.302 18.102,61.377 17.082,61.377 17.007,61.452 17.007,61.676 17.082,61.75 18.102,61.75 18.177,61.825 18.177,62.049 18.102,62.123 17.082,62.123 17.007,62.198 17.007,62.422 17.082,62.497 18.102,62.497 18.177,62.571 18.177,62.795 18.102,62.87 17.082,62.87 17.007,62.944 17.007,63.168 17.082,63.243 18.102,63.243 18.177,63.318 18.177,63.541 18.102,63.616 17.082,63.616 17.007,63.691 17.007,63.915 17.082,63.989 18.102,63.989 18.177,64.064 18.177,64.288 18.102,64.363 17.082,64.363 17.007,64.437 17.007,64.661 17.082,64.736 17.935,64.736 18.01,64.81 18.01,65.034 17.935,65.109 17.825,65.109 17.75,65.184 17.75,65.965 18.163,66.378 19.012,67.227 23.32,67.227 23.901,66.646 26.131,66.646 26.442,66.335 26.7,66.335 27.112,65.923 27.723,65.923 28.769,64.877 29.431,64.877 29.898,65.344 29.898,65.38 29.968,65.45 v1(32.775,65.45)
  S8 (SIG) w0.1: 51.725,64.15 52.68,64.15 52.78,64.05 53.07,64.05 53.17,64.15 55.027,64.15 55.138,64.04 55.138,63.85 55.343,63.645 55.533,63.645 55.933,63.244 55.933,61.949 v1(56.288,61.595)
  S8 (SIG) w0.119: v1(26.9,51.375) 26.935,51.41 26.935,52.69 24.425,55.2 24.425,55.457 24.017,55.866 24.017,56.181 24.425,56.589 24.425,58.138 24.583,58.295 24.583,58.915 28.786,63.119 29.406,63.119 29.528,63.24 41.522,63.24 42.431,64.15 51.725,64.15
  S10 (SIG) w0.18: R610.2@23.675,66.959 24.359,66.959 26.033,65.285 32.55,65.285 32.715,65.45 v1(32.775,65.45)
DDR_A11: R611.2 U300.G4 U700.R7 U701.R7 | length 114.4
  S1 (SIG) w0.11: v1(55.488,60.795) U300.G4@55.888,60.395
  S1 (SIG) w0.18: v1(30.425,49.25) 31,49.25 U701.R7@31.7,48.55 ; v1(31.3,64.4) U700.R7@31.7,64
  S3 (SIG) w0.119: v1(30.425,49.25) 30.425,53.316 28.706,55.036 28.706,55.203 27.853,56.056 26.647,56.056 26.507,55.915 25.358,55.915 25.218,56.056 24.908,56.056 24.075,56.888 21.897,56.888 21.25,57.535 21.25,58.225 21.25,58.285 21.175,58.359 21.062,58.359 20.987,58.434 20.987,58.658 21.062,58.732 21.633,58.732 21.707,58.807 21.707,59.031 21.633,59.106 21.062,59.106 20.987,59.18 20.987,59.404 21.062,59.479 21.633,59.479 21.707,59.553 21.707,59.777 21.633,59.852 21.062,59.852 20.987,59.927 20.987,60.151 21.062,60.225 21.633,60.225 21.707,60.3 21.707,60.524 21.633,60.598 21.062,60.598 20.987,60.673 20.987,60.897 21.062,60.972 21.633,60.972 21.707,61.046 21.707,61.27 21.633,61.345 21.062,61.345 20.987,61.419 20.987,61.643 21.062,61.718 21.633,61.718 21.707,61.793 21.707,62.016 21.633,62.091 21.062,62.091 20.987,62.166 20.987,62.39 21.062,62.464 21.509,62.464 21.584,62.539 21.584,62.763 21.509,62.838 21.325,62.838 21.25,62.912 21.25,64.375 21.261,64.386 21.75,64.875 22.425,64.875 22.8,65.25 23.156,65.25 23.23,65.325 23.23,65.694 23.305,65.769 23.529,65.769 23.603,65.694 23.603,64.921 23.678,64.847 23.902,64.847 23.977,64.921 23.977,65.694 24.051,65.769 24.275,65.769 24.35,65.694 24.35,64.921 24.424,64.847 24.648,64.847 24.723,64.921 24.723,65.694 24.798,65.769 25.022,65.769 25.096,65.694 25.096,64.921 25.171,64.847 25.395,64.847 25.469,64.921 25.469,65.694 25.544,65.769 25.768,65.769 25.843,65.694 25.843,64.921 25.917,64.847 26.141,64.847 26.216,64.921 26.216,65.175 26.29,65.25 26.35,65.25 26.545,65.25 26.986,64.81 27.013,64.81 27.453,64.369 27.988,64.369 28.357,64 29.134,64 29.894,63.24 31.449,63.24 31.66,63.451 31.66,64.04 v1(31.3,64.4)
  S8 (SIG) w0.1: 51.9,60.29 52.32,60.29 52.88,60.85 53.214,60.85 53.509,61.145 55.138,61.145 v1(55.488,60.795)
  S8 (SIG) w0.119: v1(30.425,49.25) 30.425,52.594 30.17,52.849 30.132,52.849 30.11,52.871 29.824,53.158 29.802,53.179 29.802,53.313 29.673,53.441 29.632,53.441 28.531,54.542 28.531,54.73 28.267,54.994 28.267,55.021 27.982,55.307 27.94,55.349 27.676,55.613 27.676,55.718 28.478,56.521 28.478,56.626 28.32,56.785 28.214,56.785 27.412,55.982 27.306,55.982 27.148,56.141 27.148,56.246 28.478,57.576 28.478,57.682 28.32,57.84 28.214,57.84 26.884,56.51 26.779,56.51 26.523,56.765 26.481,56.808 26.4,56.888 26.4,58.75 28.175,60.525 28.235,60.525 28.309,60.6 28.309,60.631 28.384,60.706 28.608,60.706 28.682,60.631 28.682,60.6 28.757,60.525 28.981,60.525 29.056,60.6 29.056,60.631 29.13,60.706 29.354,60.706 29.429,60.631 29.429,60.6 29.503,60.525 29.727,60.525 29.802,60.6 29.802,60.631 29.877,60.706 30.101,60.706 30.175,60.631 30.175,60.6 30.25,60.525 30.474,60.525 30.548,60.6 30.548,60.631 30.623,60.706 30.847,60.706 30.922,60.631 30.922,60.6 30.996,60.525 31.22,60.525 31.295,60.6 31.295,60.631 31.369,60.706 31.593,60.706 31.668,60.631 31.668,60.6 31.743,60.525 31.967,60.525 32.041,60.6 32.041,60.631 32.116,60.706 32.34,60.706 32.414,60.631 32.414,60.6 32.489,60.525 32.713,60.525 32.788,60.6 32.788,60.631 32.862,60.706 33.086,60.706 33.161,60.631 33.161,60.6 33.235,60.525 33.459,60.525 33.534,60.6 33.534,60.631 33.609,60.706 33.832,60.706 33.907,60.631 33.907,60.6 33.982,60.525 34.206,60.525 34.28,60.6 34.28,60.631 34.355,60.706 34.579,60.706 34.653,60.631 34.653,60.6 34.728,60.525 34.952,60.525 35.027,60.6 35.027,60.631 35.101,60.706 35.325,60.706 35.4,60.631 35.4,60.6 35.475,60.525 35.698,60.525 35.773,60.6 35.773,60.631 35.848,60.706 36.072,60.706 36.146,60.631 36.146,60.6 36.221,60.525 36.445,60.525 36.519,60.6 36.519,60.631 36.594,60.706 36.818,60.706 36.893,60.631 36.893,60.6 36.967,60.525 37.191,60.525 37.266,60.6 37.266,60.631 37.34,60.706 37.564,60.706 37.639,60.631 37.639,60.6 37.714,60.525 37.938,60.525 38.012,60.6 38.012,60.631 38.087,60.706 38.311,60.706 38.385,60.631 38.385,60.6 38.46,60.525 38.684,60.525 38.759,60.6 38.759,60.631 38.833,60.706 39.057,60.706 39.132,60.631 39.132,60.6 39.206,60.525 39.43,60.525 39.505,60.6 39.505,60.631 39.58,60.706 39.804,60.706 39.878,60.631 39.878,60.6 39.953,60.525 40.177,60.525 40.251,60.6 40.251,60.631 40.326,60.706 40.55,60.706 40.625,60.631 40.625,60.6 40.699,60.525 40.923,60.525 40.998,60.6 40.998,60.631 41.072,60.706 41.296,60.706 41.371,60.631 41.371,60.6 41.446,60.525 41.669,60.525 41.744,60.6 41.744,60.631 41.819,60.706 42.043,60.706 42.117,60.631 42.117,60.6 42.192,60.525 42.416,60.525 42.49,60.6 42.49,60.631 42.565,60.706 42.789,60.706 42.864,60.631 42.864,60.6 42.938,60.525 43.162,60.525 43.237,60.6 43.237,60.631 43.311,60.706 43.535,60.706 43.61,60.631 43.61,60.6 43.685,60.525 43.909,60.525 43.983,60.6 43.983,60.631 44.058,60.706 44.282,60.706 44.356,60.631 44.356,60.6 44.431,60.525 44.655,60.525 44.73,60.6 44.73,60.631 44.804,60.706 45.028,60.706 45.103,60.631 45.103,60.6 45.177,60.525 45.65,60.525 46.101,60.525 47.09,59.536 47.09,59.451 47.301,59.24 47.599,59.24 47.81,59.451 47.81,59.536 47.939,59.665 48.024,59.665 48.037,59.679 48.375,59.679 48.389,59.665 48.686,59.665 50.081,61.06 50.474,61.06 50.788,60.746 50.788,60.604 51.101,60.29 51.9,60.29
  S10 (SIG) w0.18: R611.2@23.675,61.456 23.675,62.001 25.664,63.99 30.89,63.99 v1(31.3,64.4)
DDR_A12: R612.2 U300.E4 U700.N7 U701.N7 | length 120.3
  S1 (SIG) w0.11: v1(55.488,62.395) U300.E4@55.888,61.995
  S1 (SIG) w0.18: v1(32.9,48.95) U701.N7@33.3,48.55 ; v1(32.9,64.4) U700.N7@33.3,64
  S3 (SIG) w0.119: v1(32.9,48.95) 33.34,49.39 33.34,52.299 33.675,52.634 33.675,53.266 32.546,54.395 31.783,54.395 31.51,54.669 31.02,54.669 30.921,54.767 30.283,54.767 29.582,55.468 29.582,55.566 28.216,56.932 26.418,56.932 26,57.35 26,57.55 26,57.61 25.925,57.684 25.265,57.684 25.19,57.759 25.19,57.983 25.265,58.057 26.575,58.057 26.65,58.132 26.65,58.356 26.575,58.431 25.265,58.431 25.19,58.505 25.19,58.729 25.265,58.804 26.575,58.804 26.65,58.878 26.65,59.102 26.575,59.177 25.265,59.177 25.19,59.252 25.19,59.476 25.265,59.55 26.575,59.55 26.65,59.625 26.65,59.849 26.575,59.923 25.265,59.923 25.19,59.998 25.19,60.222 25.265,60.297 25.925,60.297 26,60.371 26,60.448 26,60.525 26.683,61.208 26.743,61.268 ccw(c26.652,61.357) 26.779,61.357 26.779,61.72 cw(c26.854,61.72) 26.854,61.794 27.078,61.794 cw(c27.078,61.72) 27.153,61.72 27.153,60.655 ccw(c27.227,60.655) 27.227,60.58 27.451,60.58 ccw(c27.451,60.655) 27.526,60.655 27.526,61.72 cw(c27.601,61.72) 27.601,61.794 27.824,61.794 cw(c27.824,61.72) 27.899,61.72 27.899,60.655 ccw(c27.974,60.655) 27.974,60.58 28.198,60.58 ccw(c28.198,60.655) 28.272,60.655 28.272,61.72 cw(c28.347,61.72) 28.347,61.794 28.571,61.794 cw(c28.571,61.72) 28.645,61.72 28.645,60.922 ccw(c28.72,60.922) 28.72,60.847 28.944,60.847 ccw(c28.944,60.922) 29.019,60.922 29.019,61.72 cw(c29.093,61.72) 29.093,61.794 29.317,61.794 cw(c29.317,61.72) 29.392,61.72 29.392,61.057 ccw(c29.466,61.057) 29.466,60.983 29.69,60.983 ccw(c29.69,61.057) 29.765,61.057 29.765,61.72 cw(c29.84,61.72) 29.84,61.794 30.064,61.794 cw(c30.064,61.72) 30.138,61.72 30.138,61.057 ccw(c30.213,61.057) 30.213,60.983 30.437,60.983 ccw(c30.437,61.057) 30.511,61.057 30.511,61.566 cw(c30.586,61.566) 30.586,61.64 30.81,61.64 cw(c30.81,61.566) 30.885,61.566 30.885,61.54 ccw(c31.004,61.54) 31.004,61.421 32.34,61.421 32.524,61.605 32.559,61.64 33.849,61.64 34.06,61.851 34.06,62.149 33.34,62.868 33.34,63.96 v1(32.9,64.4)
  S8 (SIG) w0.1: 51.725,62.872 51.778,62.925 52.095,62.925 52.3,62.72 52.3,62.7 52.605,62.395 53.393,62.395 53.743,62.745 54.833,62.745 55.183,62.395 v1(55.488,62.395)
  S8 (SIG) w0.119: v1(32.9,48.95) 32.882,48.95 31.722,47.79 30.351,47.79 29.24,48.901 29.24,50.322 29.304,50.385 29.304,52.747 27.61,54.442 27.61,54.749 25.021,57.337 25.021,58.734 28.647,62.36 35.55,62.36 36.104,61.806 37.166,61.806 37.331,61.64 39.449,61.64 39.578,61.769 40.972,61.769 41.176,61.565 41.644,61.565 41.694,61.515 42.324,61.515 42.629,61.821 43.789,61.821 44.678,62.71 44.955,62.71 45.014,62.71 45.108,62.804 45.108,63.087 45.202,63.181 45.642,63.181 45.736,63.087 45.736,62.258 45.83,62.164 46.269,62.164 46.363,62.258 46.363,62.899 46.457,62.993 46.896,62.993 46.99,62.899 46.99,62.395 47.084,62.301 47.523,62.301 47.617,62.395 47.617,63.087 47.711,63.181 48.15,63.181 48.244,63.087 48.244,62.395 48.338,62.301 48.777,62.301 48.872,62.395 48.872,62.965 48.966,63.059 49.405,63.059 49.499,62.965 49.499,62.804 49.593,62.71 50.018,62.71 51.562,62.71 51.725,62.872
  S10 (SIG) w0.18: R612.2@23.675,53.697 27.517,57.539 28.728,57.539 32.385,61.195 32.385,61.733 32.51,61.858 32.51,62.245 33.29,63.025 33.29,64.01 v1(32.9,64.4)
DDR_A13: R613.2 U300.D4 U700.T3 U701.T3 | length 117.2
  S1 (SIG) w0.11: v1(55.488,63.195) U300.D4@55.888,62.795
  S1 (SIG) w0.18: v1(27.5,52.025) 27.52,52.045 28.483,52.045 28.778,51.75 U701.T3@30.9,51.75 ; v1(30.5,66.8) U700.T3@30.9,67.2
  S3 (SIG) w0.119: v1(27.5,52.025) 26.935,52.59 26.935,52.874 26.071,53.738 24.722,53.738 23.56,54.9 23.56,54.924 23.349,55.135 23.051,55.135 22.516,54.6 21.845,54.6 21.792,54.653 19.272,54.653 19.141,54.784 19.099,54.826 19,54.826 18.866,54.692 18.787,54.692 18.602,54.877 18.602,54.956 18.746,55.1 18.746,55.179 18.561,55.364 18.482,55.364 18.128,55.01 18.048,55.01 17.864,55.194 17.864,55.273 18.218,55.628 18.218,55.707 18.033,55.892 17.954,55.892 17.6,55.537 17.521,55.537 17.336,55.722 17.336,55.801 17.69,56.156 17.69,56.235 17.506,56.419 17.426,56.419 17.072,56.065 16.993,56.065 16.808,56.25 16.808,56.329 17.162,56.683 17.162,56.763 16.978,56.947 16.899,56.947 16.544,56.593 16.465,56.593 16.28,56.778 16.28,56.857 16.688,57.264 16.688,57.343 16.503,57.528 16.424,57.528 16.017,57.121 15.937,57.121 15.753,57.305 15.753,57.385 16.267,57.899 16.267,57.978 16.082,58.163 16.003,58.163 15.489,57.648 15.41,57.648 15.225,57.833 15.225,57.912 15.739,58.427 15.739,58.506 15.554,58.691 15.475,58.691 14.961,58.176 14.882,58.176 14.697,58.361 14.697,58.44 15.202,58.945 15.202,59.043 14.821,59.424 14.806,59.439 14.806,59.623 14.806,59.682 14.712,59.776 14.263,59.776 14.169,59.87 14.169,60.309 14.263,60.403 14.712,60.403 14.806,60.498 14.806,60.62 14.806,64.336 18.574,68.104 23.683,68.104 24.264,67.522 26.494,67.522 26.805,67.212 27.063,67.212 27.475,66.8 v1(30.5,66.8)
  S8 (SIG) w0.1: 51.725,63.4 52.105,63.4 52.585,63.88 52.668,63.88 52.697,63.85 53.153,63.85 53.228,63.925 54.757,63.925 v1(55.488,63.195)
  S8 (SIG) w0.119: v1(27.5,52.025) 27.5,53.535 26.917,54.118 26.874,54.161 26.741,54.161 26.336,53.755 26.203,53.755 25.892,54.065 25.892,54.198 26.805,55.111 26.805,55.244 26.494,55.554 26.361,55.554 25.449,54.642 25.316,54.642 25.005,54.952 25.005,55.085 25.918,55.998 25.918,56.131 25.607,56.441 25.474,56.441 24.679,55.646 24.546,55.646 24.236,55.957 24.236,56.09 24.802,56.656 24.802,56.92 24.802,58.825 28.877,62.9 29.206,62.9 29.893,62.9 29.987,62.806 29.987,62.673 30.081,62.579 30.52,62.579 30.614,62.673 30.614,62.927 30.708,63.021 31.148,63.021 31.242,62.927 31.242,62.673 31.336,62.579 31.775,62.579 31.869,62.673 31.869,62.927 31.963,63.021 32.402,63.021 32.496,62.927 32.496,62.673 32.59,62.579 33.029,62.579 33.123,62.673 33.123,62.927 33.217,63.021 33.656,63.021 33.75,62.927 33.75,62.673 33.844,62.579 34.283,62.579 34.378,62.673 34.378,62.806 34.472,62.9 35.319,62.9 35.724,62.495 36.696,62.495 36.751,62.44 38.047,62.44 38.141,62.534 38.141,62.927 38.235,63.021 38.674,63.021 38.768,62.927 38.768,62.534 38.862,62.44 40.249,62.44 40.304,62.495 41.183,62.495 41.277,62.401 41.277,62.379 41.371,62.285 41.81,62.285 41.938,62.413 42.071,62.413 42.225,62.259 42.443,62.04 43.624,62.04 44.984,63.4 45.622,63.4 45.681,63.4 45.775,63.494 45.775,63.77 45.869,63.864 46.308,63.864 46.402,63.77 46.402,63.306 46.496,63.212 46.936,63.212 47.03,63.306 47.124,63.4 48.566,63.4 51.725,63.4
  S10 (SIG) w0.18: R613.2@23.675,73.325 26.136,70.864 26.136,70.141 29.478,66.8 v1(30.5,66.8)
DDR_A14: R614.2 U300.F4 U700.T7 U701.T7 | length 112.2
  S1 (SIG) w0.11: v1(55.488,61.595) U300.F4@55.888,61.195
  S1 (SIG) w0.18: v1(29.6,49.125) 30.175,48.55 U701.T7@30.9,48.55 ; v1(30.5,64.4) U700.T7@30.9,64
  S3 (SIG) w0.119: v1(29.6,49.125) 29.6,51.044 29.917,51.361 29.917,53.204 28.267,54.854 28.267,55.021 27.671,55.617 26.829,55.617 26.688,55.477 25.177,55.477 25.036,55.617 24.726,55.617 23.894,56.45 21.295,56.45 21.253,56.492 20.989,56.756 20.989,56.854 21.11,56.976 21.11,57.055 20.925,57.24 20.846,57.24 20.715,57.109 20.636,57.109 20.451,57.293 20.451,57.372 20.582,57.504 20.582,57.583 20.398,57.767 20.318,57.767 20.197,57.646 20.098,57.646 19.755,57.99 19.755,58.158 19.755,58.227 19.755,58.287 19.68,58.362 19.457,58.362 19.383,58.436 19.383,58.66 19.457,58.735 20.081,58.735 20.156,58.81 20.156,59.033 20.081,59.108 19.362,59.108 19.287,59.183 19.287,59.407 19.362,59.481 19.989,59.481 20.064,59.556 20.064,59.78 19.989,59.854 19.362,59.854 19.287,59.929 19.287,60.153 19.362,60.228 19.989,60.228 20.064,60.302 20.064,60.526 19.989,60.601 19.362,60.601 19.287,60.676 19.287,60.899 19.362,60.974 19.989,60.974 20.064,61.049 20.064,61.273 19.989,61.347 19.362,61.347 19.287,61.422 19.287,61.646 19.362,61.72 19.989,61.72 20.064,61.795 20.064,62.019 19.989,62.094 19.362,62.094 19.287,62.168 19.287,62.392 19.362,62.467 19.989,62.467 20.064,62.541 20.064,62.765 19.989,62.84 19.362,62.84 19.287,62.915 19.287,63.139 19.362,63.213 19.989,63.213 20.064,63.288 20.064,63.512 19.989,63.586 19.362,63.586 19.287,63.661 19.287,63.885 19.362,63.96 19.989,63.96 20.064,64.034 20.064,64.258 19.989,64.333 19.823,64.333 19.748,64.407 19.748,64.631 19.823,64.706 19.989,64.706 20.064,64.781 20.064,65.005 19.989,65.079 19.808,65.079 19.733,65.154 19.733,65.378 19.808,65.452 19.989,65.452 20.064,65.527 20.064,65.751 19.989,65.826 19.514,65.826 19.439,65.9 19.439,66.124 19.514,66.199 19.764,66.199 20.313,66.748 20.354,66.789 23.081,66.789 23.663,66.207 25.95,66.207 26.26,65.896 26.519,65.896 26.93,65.485 27.542,65.485 28.588,64.439 29.315,64.439 29.354,64.4 v1(30.5,64.4)
  S8 (SIG) w0.1: 51.9,61.945 55.138,61.945 v1(55.488,61.595)
  S8 (SIG) w0.119: v1(29.6,49.125) 29.6,52.761 27.829,54.532 27.829,54.84 25.24,57.428 25.24,58.643 28.184,61.587 37.075,61.587 37.24,61.421 39.54,61.421 39.669,61.55 40.881,61.55 41.085,61.346 41.553,61.346 41.603,61.296 42.414,61.296 42.72,61.602 43.88,61.602 44.223,61.945 46.5,61.945 46.933,61.945 47.007,61.87 47.007,60.797 47.082,60.722 47.306,60.722 47.381,60.797 47.381,62.007 47.455,62.082 47.679,62.082 47.754,62.007 47.754,60.459 47.828,60.385 48.052,60.385 48.127,60.459 48.127,62.007 48.202,62.082 48.426,62.082 48.5,62.007 48.5,60.459 48.575,60.385 48.799,60.385 48.873,60.459 48.873,61.955 48.948,62.029 49.172,62.029 49.247,61.955 49.247,61.87 49.321,61.795 49.545,61.795 49.62,61.87 49.694,61.945 51.675,61.945 51.9,61.945
  S10 (SIG) w0.18: R614.2@23.675,64.8 24.076,64.4 v1(30.5,64.4)
DDR_BA0: R615.2 U300.L5 U700.M2 U701.M2 | length 129
  S1 (SIG) w0.11: v1(56.288,56.795) U300.L5@56.688,57.195
  S1 (SIG) w0.18: v1(27.25,54.6) 31.9,54.6 32.875,53.625 32.875,53.527 32.89,53.512 32.89,53.04 32.99,52.94 33.71,52.94 U701.M2@34.1,52.55 ; U700.M2@34.1,68 v1(34.5,67.6)
  S3 (SIG) w0.119: v1(27.25,54.6) 24.48,54.6 23.998,55.082 23.998,55.106 23.531,55.573 22.869,55.573 22.388,55.091 20.657,55.091 16.445,59.303 16.075,59.673 16.075,60.035 16,60.109 15.5,60.109 15.426,60.184 15.426,60.408 15.5,60.483 16.41,60.483 16.484,60.557 16.484,60.781 16.41,60.856 15.449,60.856 15.375,60.93 15.375,61.154 15.449,61.229 16.41,61.229 16.484,61.304 16.484,61.528 16.41,61.602 15.449,61.602 15.375,61.677 15.375,61.901 15.449,61.975 16.41,61.975 16.484,62.05 16.484,62.274 16.41,62.349 15.449,62.349 15.375,62.423 15.375,62.647 15.449,62.722 16.41,62.722 16.484,62.796 16.484,63.02 16.41,63.095 15.449,63.095 15.375,63.17 15.375,63.394 15.449,63.468 16.41,63.468 16.484,63.543 16.484,63.767 16.41,63.841 15.449,63.841 15.375,63.916 15.375,64.14 15.449,64.215 16.41,64.215 16.484,64.289 16.484,64.513 16.41,64.588 16.15,64.588 16.075,64.662 16.075,64.935 16.075,64.985 18.755,67.665 23.501,67.665 24.083,67.084 26.313,67.084 26.623,66.773 26.882,66.773 27.293,66.362 27.905,66.362 28.951,65.315 29.249,65.315 29.46,65.526 29.46,65.737 29.826,66.104 31.112,66.104 31.74,66.732 31.74,66.949 32.751,67.96 34.14,67.96 v1(34.5,67.6)
  S8 (SIG) w0.1: 52.729,48.45 52.729,49.698 53.538,50.506 53.538,50.54 53.743,50.745 54.513,50.745 54.613,50.645 55.715,50.645 56.615,51.545 57.133,51.545 57.538,51.95 57.538,52.423 58.438,53.323 58.438,55.14 57.233,56.345 56.738,56.345 v1(56.288,56.795)
  S8 (SIG) w0.119: v1(27.25,54.6) 27.25,54.095 27.86,53.485 27.86,48.372 32.151,44.081 49.426,44.081 52.729,47.384 52.729,48.45
  S10 (SIG) w0.18: R615.2@23.675,80.855 34.5,70.03 v1(34.5,67.6)